# EAGLE board dac_ (EAGLE 9.0.1)
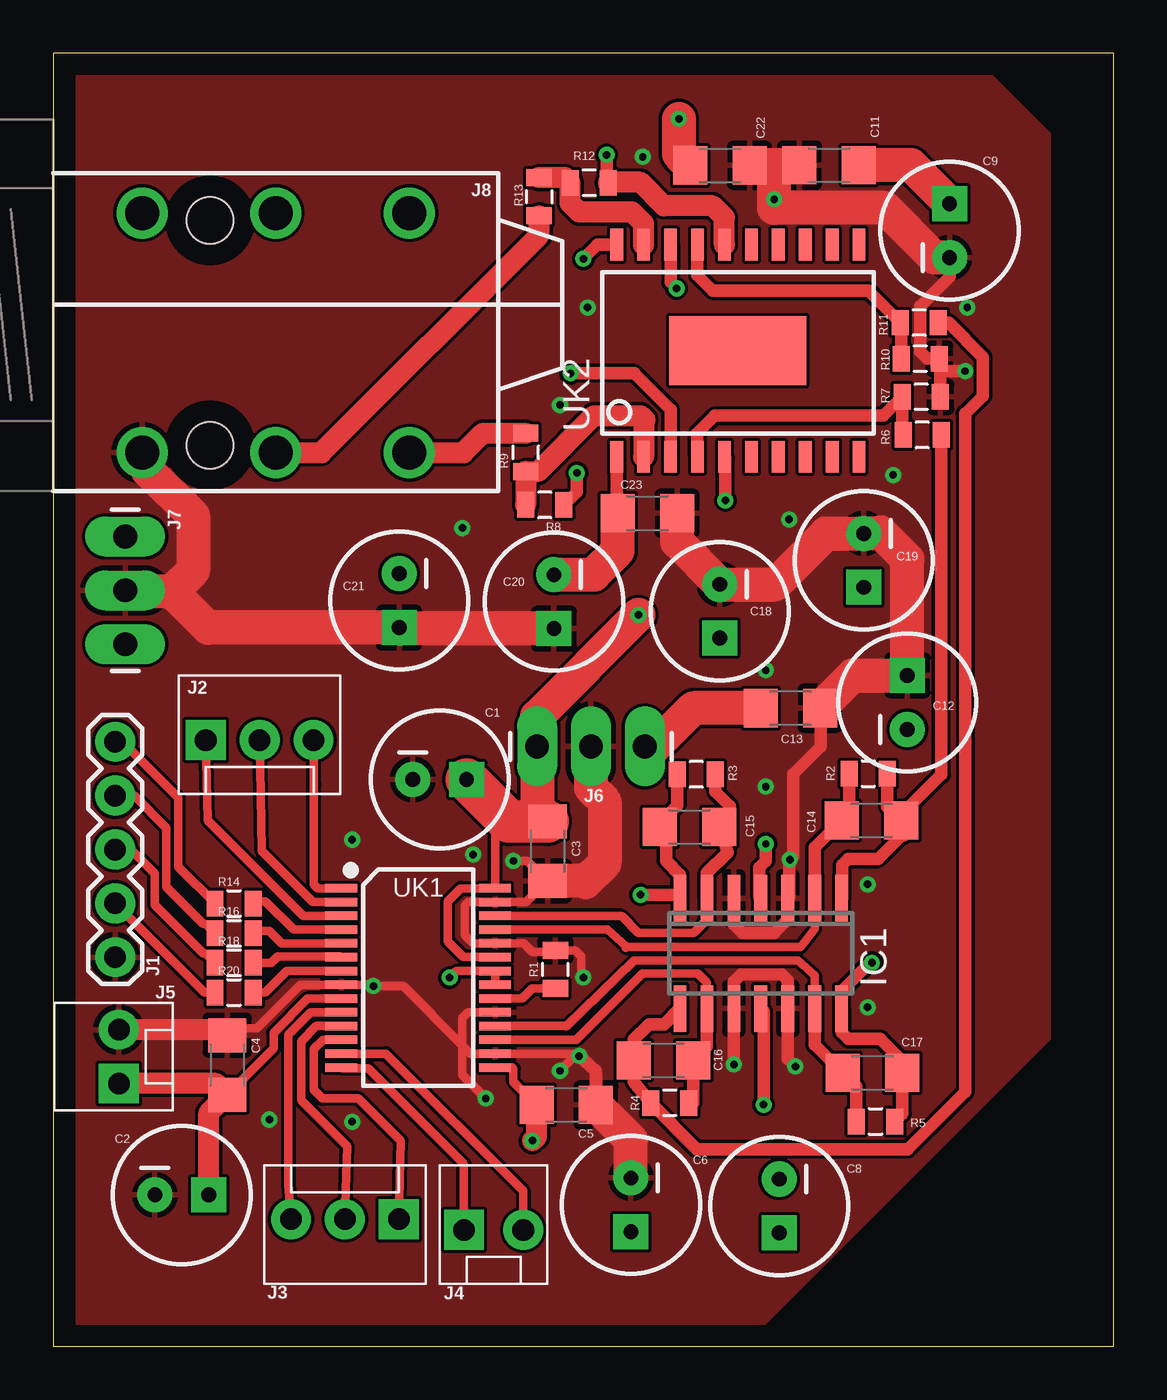
[diagram p0: board, top side]
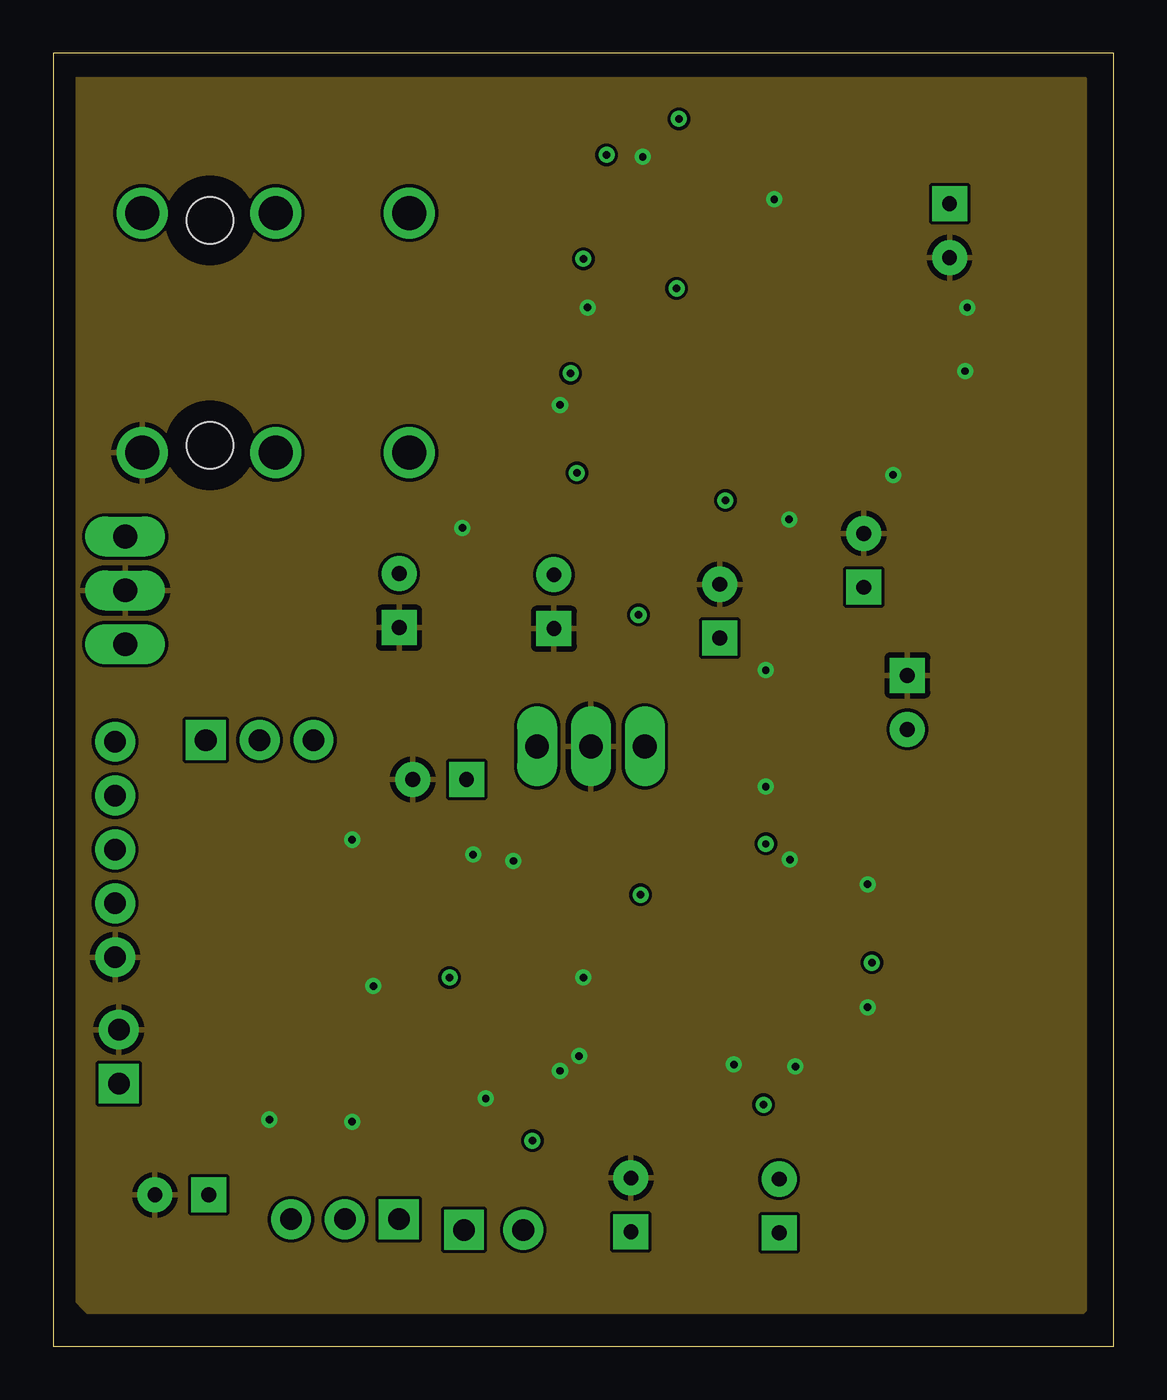
[diagram p1: board, inner layer DGND]
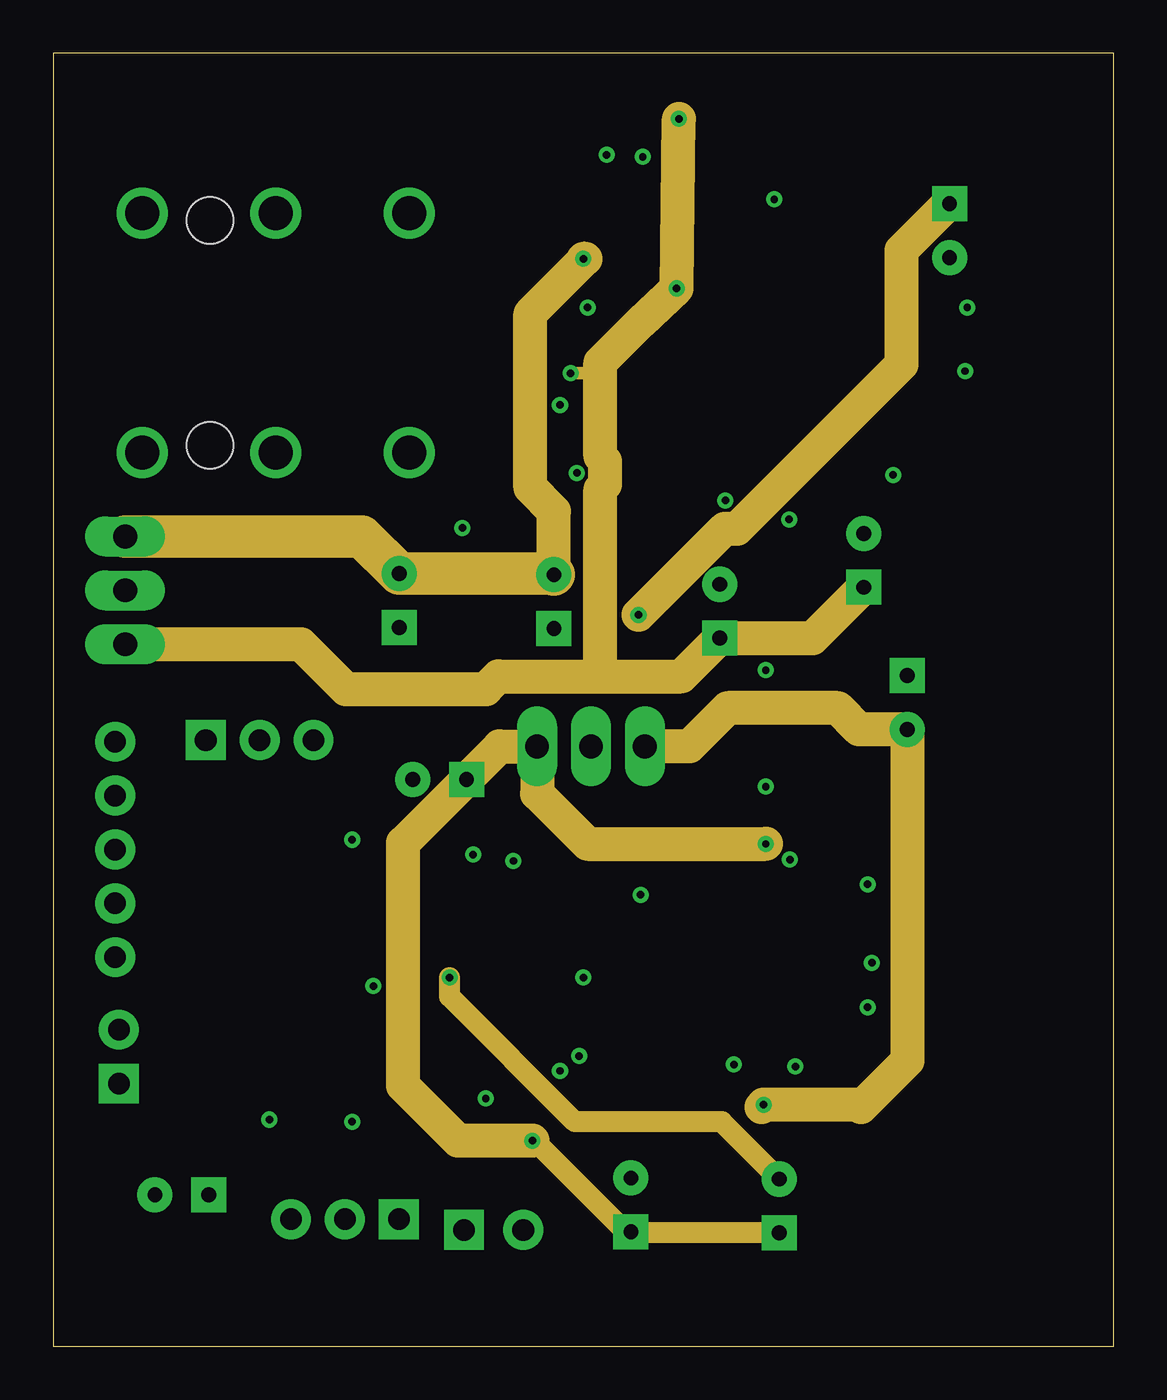
[diagram p2: board, inner layer Route15]
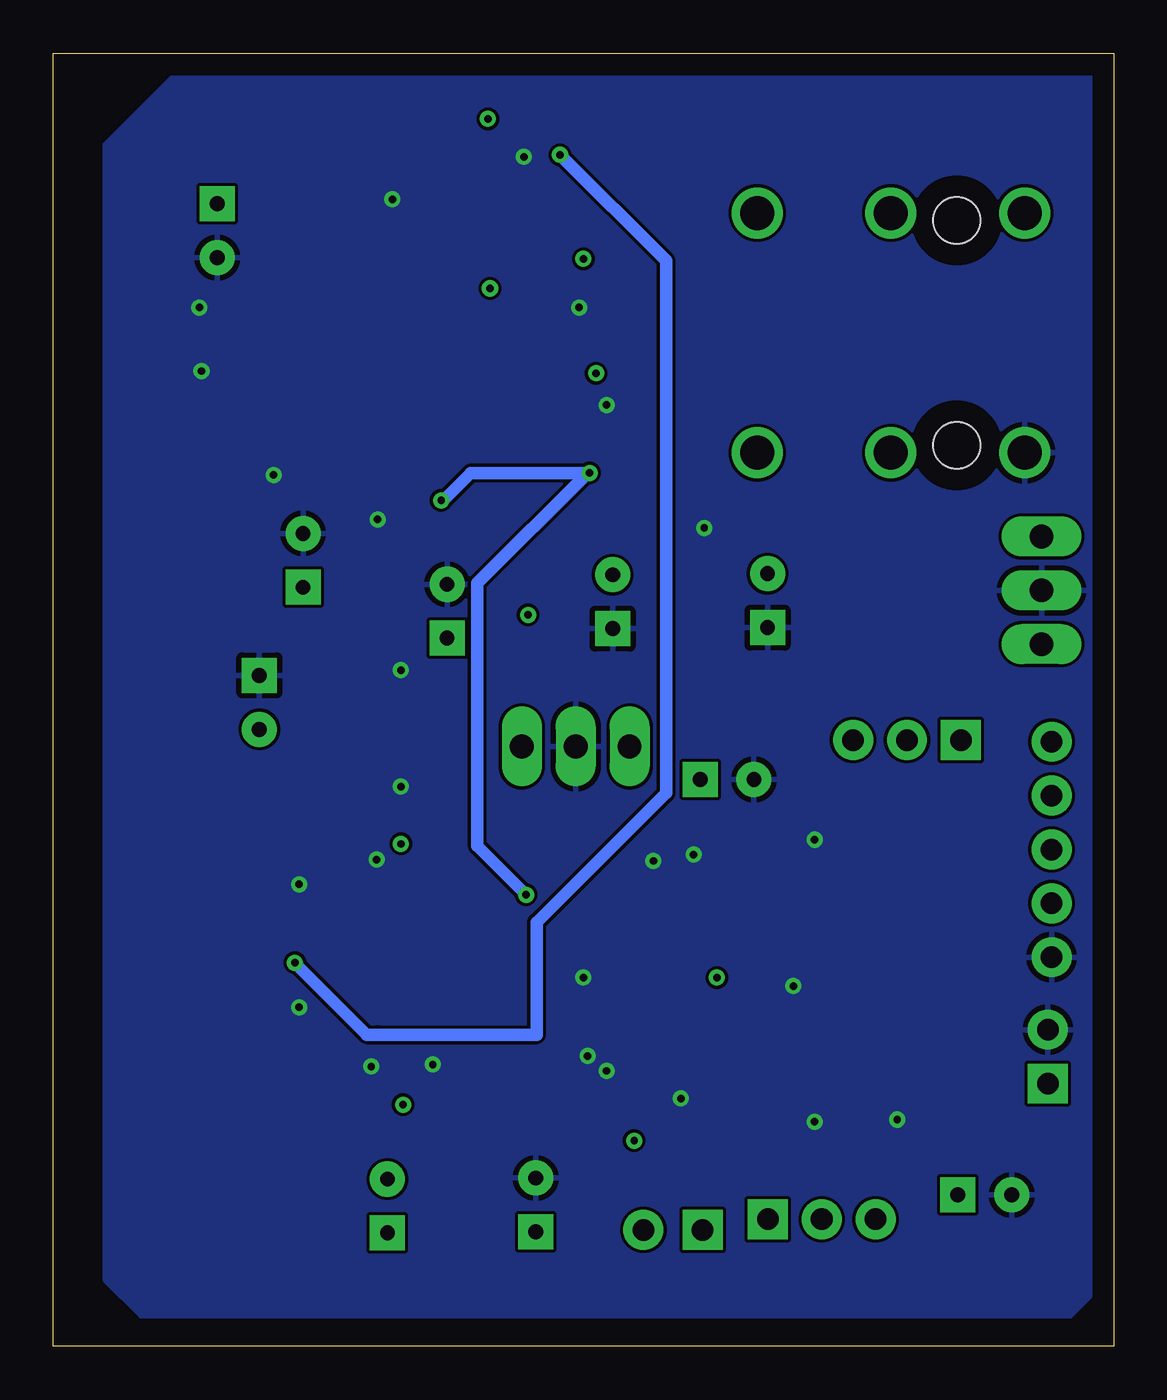
[diagram p3: board, bottom side, seen from below]

Size 50 x 61 mm. Coordinates in mm from the lower left corner, seen from the top.
Outline: 0,0 50,0 50,61 0,61 0,0
Copper layers (1*2+15*16): Top 0.035mm / dielectric 0.2mm / DGND 0.035mm / dielectric 0.3mm / Route15 0.035mm / dielectric 0.2mm / Bottom 0.035mm
Design rules "default *": minimum track width 6mil, minimum drill 0.35mm, track to track 6mil, track to pad 6mil, pad to pad 6mil, via to via 6mil, smd to smd 6mil, copper to edge 40mil, drill to drill 6mil, minimum pad ring 10mil, minimum via ring 8mil, stop-mask expansion 4mil, vias tented up to drill 0mil, thermal gap 10mil

## Footprints (pad centres in the part's own frame; a part is rotated, then mirrored left to right if it is on the bottom)
CPOL-RADIAL-100UF-25V = drill 0.7 pad 1.651 square: 1 1.27,0 | drill 0.7 pad 1.651: 2 -1.27,0
1206 = smd 1.6 x 1.8: 1 -1.4,0; 2 1.4,0
SO14 = smd 0.6 x 2.2: 1 -3.81,-2.6; 2 -2.54,-2.6; 3 -1.27,-2.6; 4 0,-2.6; 5 1.27,-2.6; 6 2.54,-2.6; 7 3.81,-2.6; 8 3.81,2.6; 9 2.54,2.6; 10 1.27,2.6; 11 0,2.6; 12 -1.27,2.6; 13 -2.54,2.6; 14 -3.81,2.6
1X05 = drill 1.016 pad 1.88: 1 0,0; 2 2.54,0; 3 5.08,0; 4 7.62,0; 5 10.16,0
MOLEX-1X3 = drill 1.016 pad 1.88 square: 1 0,0 | drill 1.016 pad 1.88: 2 2.54,0; 3 5.08,0
MOLEX-1X2_LOCK = drill 1.016 pad 1.88 square: 1 -0.127,0 | drill 1.016 pad 1.88: 2 2.667,0
MOLEX-1X2 = drill 1.016 pad 1.88 square: 1 0,0 | drill 1.016 pad 1.88: 2 2.54,0
1X03_LONGPADS = drill 1.118 pad 1.88 long: 1 0,0; 2 2.54,0; 3 5.08,0
AUDIO_JACK_0.25"_TRS_PTH_RA = drill 1.6: RING 10.5,-6.95; RING-NORM 10.5,4.35; SLEEVE 4.2,-6.95; SLEEVE-NORM 4.2,4.35; TIP 16.8,-6.95; TIP-NORM 16.8,4.35 | hole 2.2: 7.4,4; 7.4,-6.6
0805 = smd 0.8 x 1.2: 1 -0.9,0; 2 0.9,0
SSOP28-0.65-10.2X5.2MM = smd 0.4 x 1.5: 1 -4.225,-3.625; 2 -3.575,-3.625; 3 -2.925,-3.625; 4 -2.275,-3.625; 5 -1.625,-3.625; 6 -0.975,-3.625; 7 -0.325,-3.625; 8 0.325,-3.625; 9 0.975,-3.625; 10 1.625,-3.625; 11 2.275,-3.625; 12 2.925,-3.625; 13 3.575,-3.625; 14 4.225,-3.625; 15 4.225,3.625; 16 3.575,3.625; 17 2.925,3.625; 18 2.275,3.625; 19 1.625,3.625; 20 0.975,3.625; 21 0.325,3.625; 22 -0.325,3.625; 23 -0.975,3.625; 24 -1.625,3.625; 25 -2.275,3.625; 26 -2.925,3.625; 27 -3.575,3.625; 28 -4.225,3.625
SOIC20S = smd 0.6 x 1.5: 1 -5.715,-5; 2 -4.445,-5; 3 -3.175,-5; 4 -1.905,-5; 5 -0.635,-5; 6 0.635,-5; 7 1.905,-5; 8 3.175,-5; 9 4.445,-5; 10 5.715,-5; 11 5.715,5; 12 4.445,5; 13 3.175,5; 14 1.905,5; 15 0.635,5; 16 -0.635,5; 17 -1.905,5; 18 -3.175,5; 19 -4.445,5; 20 -5.715,5 | smd 6.452 x 3.251: P$1 0,0

## Placement (x,y rotation side)
C1  10uF  [CPOL-RADIAL-100UF-25V]  18.23,26.75 0 top
C2  10uF  [CPOL-RADIAL-100UF-25V]  6.08,7.14 0 top
C3  0.1uF  [1206]  23.31,23.35 270 top
C4  0.1uF  [1206]  8.21,13.27 270 top
C5  0.1uF  [1206]  24.19,11.39 180 top
C6  10uF  [CPOL-RADIAL-100UF-25V]  27.25,6.67 270 top
C8  47uF  [CPOL-RADIAL-100UF-25V]  34.23,6.62 270 top
C9  10uF  [CPOL-RADIAL-100UF-25V]  42.27,52.62 90 top
C11  0.1uF  [1206]  36.59,55.71 0 top
C12  10uF  [CPOL-RADIAL-100UF-25V]  40.27,30.38 90 top
C13  0.1uF  [1206]  34.76,30.1 180 top
C14  2.7nF  [1206]  38.58,24.8 180 top
C15  2.7nF  [1206]  30,24.5 0 top
C16  2.7nF  [1206]  28.78,13.5 0 top
C17  2.7nF  [1206]  38.64,12.9 180 top
C18  100uF  [CPOL-RADIAL-100UF-25V]  31.43,34.67 270 top
C19  10uF  [CPOL-RADIAL-100UF-25V]  38.22,37.08 270 top
C20  10uF  [CPOL-RADIAL-100UF-25V]  23.61,35.12 270 top
C21  100uF  [CPOL-RADIAL-100UF-25V]  16.32,35.17 270 top
C22  0.1uF  [1206]  31.44,55.7 0 top
C23  0.1uF  [1206]  28.02,39.3 0 top
IC1  OPA4134UA  [SO14]  33.37,18.54 180 top
J1  I2S  [1X05]  2.93,18.36 90 top
J2  [MOLEX-1X3]  7.2,28.6 0 top
J3  [MOLEX-1X3]  16.3,6 180 top
J4  [MOLEX-1X2_LOCK]  19.5,5.5 0 top
J5  +3.3V  [MOLEX-1X2]  3.1,12.4 90 top
J6  5V/GND/-5V  [1X03_LONGPADS]  27.9,28.3 180 top
J7  12V/GND/-12V  [1X03_LONGPADS]  3.4,38.2 270 top
J8  AUDIO_JACK_TRS_0.25"_PTH_RA  [AUDIO_JACK_0.25"_TRS_PTH_RA]  0,49.1 0 top
R1  10K  [0805]  23.68,17.78 90 top
R2  1K  [0805]  38.43,27.02 0 top
R3  1K  [0805]  30.32,26.98 180 top
R4  1K  [0805]  29.07,11.48 180 top
R5  1K  [0805]  38.78,10.62 0 top
R6  1K  [0805]  40.98,42.98 180 top
R7  1K  [0805]  40.93,44.78 180 top
R8  1K  [0805]  23.18,39.69 180 top
R9  39.2  [0805]  22.29,42.17 90 top
R10  1K  [0805]  40.88,46.59 180 top
R11  1K  [0805]  40.84,48.28 180 top
R12  1K  [0805]  25.28,54.88 180 top
R13  39.2  [0805]  22.92,54.23 270 top
R14  [0805]  8.54,20.89 0 top
R16  [0805]  8.54,19.49 0 top
R18  [0805]  8.54,18.09 0 top
R20  [0805]  8.54,16.7 0 top
UK1  PCM1794A  [SSOP28-0.65-10.2X5.2MM]  17.21,17.39 270 top
UK2  TPA6120A2  [SOIC20S]  32.29,46.96 0 top

## Library data of the parts
C1-C6 C8 C9 C11-C23 R1-R14 R16 R18 R20 = SparkFun-Passives
IC1 = linear; SPICEPREFIX: J
J1 J6 J7 = SparkFun-Connectors
J2 J3 = SparkFun-Connectors; PROD_ID: CONN-08625; SF_ID: PRT-08096
J4 J5 = SparkFun-Connectors; SF_ID: PRT-09918
J8 = SparkFun-Connectors; PROD_ID: CONN-12339; SF_ID: COM-11144
UK1 UK2 = EduAreaLib

## Nets
3.3V: C2.1 C4.2 J5.1 UK1.9
5V: C1.1 C3.1 C5.2 C6.1 C8.1 C9.1 C11.2 IC1.4 J6.3 UK1.15 UK1.23 UK1.28
!RST!: J4.1 UK1.14
+12V: C18.1 C19.1 C22.1 J7.3 UK2.3 UK2.18
-5V: C12.2 C13.2 IC1.11 J6.1
-12V: C20.2 C21.2 C23.1 J7.1 UK2.1 UK2.20
BCK: R18.2 UK1.6
CHSL: J2.2 UK1.2
DATA: R16.2 UK1.5
DEM: J2.1 UK1.3
DGND: C1.2 C2.2 C3.2 C4.1 C5.1 C6.2 C9.2 C11.1 C12.1 C13.1 C18.2 C19.2 C20.1 C21.1 C22.2 C23.2 IC1.3 IC1.5 IC1.10 IC1.12 J1.1 J5.2 J6.2 J7.2 J8.SLEEVE R1.2 R7.1 R10.1 UK1.8 UK1.16 UK1.19 UK1.24 UK1.27
FMT0: J3.2 UK1.11
FMT1: J3.1 UK1.12
LOUT: J8.TIP R9.2
LRCK: R14.2 UK1.4
MONO: J2.3 UK1.1
MUTE: J3.3 UK1.10
N$1: C15.2 IC1.6 R3.1 UK1.26
N$2: C14.2 IC1.2 R2.1 UK1.25
N$3: R1.1 UK1.20
N$4: R6.2 R7.2 UK2.4
N$5: C14.1 IC1.1 R2.2 R6.1
N$6: C8.2 UK1.21 UK1.22
N$7: J1.5 R14.1
N$8: C15.1 IC1.7 R3.2 R8.1 UK2.5
N$9: R8.2 R9.1 UK2.2
N$10: R10.2 R11.2 UK2.17
N$11: R12.2 R13.1 UK2.19
N$12: C16.1 IC1.8 R4.2 R11.1
N$13: J1.4 R16.1
N$14: C16.2 IC1.9 R4.1 UK1.17
N$16: J1.3 R18.1
N$17: C17.2 IC1.13 R5.1 UK1.18
N$19: J1.2 R20.1
N$25: C17.1 IC1.14 R5.2 R12.1 UK2.16
ROUT: J8.RING R13.2
SYSCK: R20.2 UK1.7
ZERO: J4.2 UK1.13

## Tracks (layer width: path | path; a pad name or v marks a point on that pad's centre or on a via)
3.3V
  Top 0.4: UK1.9 12.01,16.41 10.4,14.8 10.4,14.06 C4.2
  Top 1: C2.1 7.34,11.01 C4.2 7.69,12.4 J5.1
5V  (via drill 0.35)
  Top 0.4: 21.49,24.75 20.84,24.11 UK1.28 19.21,21.61 18.6,21 18.6,19.1 19.34,18.36 UK1.23 | C5.2 21.7,12.48 21.7,13.1 21.64,13.16 UK1.15
  Top 0.6: v33.6,23.7 33.6,22.9 33.3,22.6 33.3,21.21 IC1.4
  Top 1: C5.2 22.79,9.89 v22.6,9.7
  Top 1.6: C9.1 40.45,55.71 C11.2 | C3.1 22.82,25.25 J6.3 22.82,29.72 v27.6,34.5
  Top 2: C3.1 21.49,24.75 C1.1
  Route15 1: C8.1 27.3,5.36 C6.1 27,5.41 22.8,9.6 22.7,9.6 v22.6,9.7
  Route15 1.6: v33.6,23.7 25.2,23.7 22.82,26.08 J6.3 21.05,28.3 C1.1 16.5,23.75 16.5,12.3 19.1,9.7 v22.6,9.7 | v27.6,34.5 31.67,38.57 32.25,38.57 40,46.32 40,51.7 42.2,53.9 C9.1
!RST!
  Top 0.4: J4.1 19.37,8.62 14.87,13.12 13.63,13.12 UK1.14
+12V  (via drill 0.35)
  Top 0.6: UK2.3 29.11,44.19 27.4,45.9 v24.4,45.9 | UK2.18 29.11,50.19 v29.4,49.9
  Top 1.6: v29.5,57.9 29.5,56.24 C22.1
  Route15 0.6: v24.4,45.9 25.3,45.9 25.8,46.4
  Route15 1.6: J7.3 11.68,33.12 13.8,31 20.4,31 21,31.6 25.8,31.6 | 25.8,31.6 29.62,31.6 C18.1 35.81,33.41 C19.1 | 25.8,31.6 25.8,40.42 26.03,40.65 26.03,41.75 25.8,41.98 25.8,46.4 27.7,48.3 v29.4,49.9 v29.5,57.9
-5V  (via drill 0.35)
  Top 0.6: v33.5,11.4 33.5,15.81 IC1.11
  Top 1.6: C13.2 30.19,30.1 28.07,27.98 28.07,27.97 27.9,27.8 J6.1
  Route15 1.6: J6.1 30,28.3 31.8,30.1 37,30.1 37.99,29.11 C12.2 40.27,13.47 38.1,11.3 38,11.4 v33.5,11.4 33.4,11.3
-12V  (via drill 0.35)
  Top 0.6: UK2.1 26.57,39.35 C23.1 | v25,51.3 25.66,51.96 UK2.20
  Top 1.6: C20.2 25.5,36.4 26.62,37.52 C23.1
  Route15 1.6: v25,51.3 25.1,51.3 22.5,48.7 22.5,40.5 23.61,39.38 C20.2
  Route15 2: C20.2 23.57,36.45 C21.2 14.56,38.2 J7.1
BCK
  Top 0.4: R18.2 10.29,18.09 10.6,18.4 13.55,18.4 UK1.6
CHSL
  Top 0.4: UK1.2 12.24,20.96 9.84,23.36 J2.2
DATA
  Top 0.4: UK1.5 10.79,19.01 10.2,19.6 9.54,19.6 R16.2
DEM
  Top 0.4: UK1.3 11.79,20.31 7.3,24.8 J2.1
DGND  (via drill 0.35)
  Top 0.4: 8.54,15 9.6,15 11.66,17.06 UK1.8 14.94,17.06 15,17 | 24.69,13.81 UK1.16 19.71,13.81 19.7,13.8 19.3,14.2 | 24.69,13.81 25.7,12.8 25.7,11 | 25.7,11 25.8,10.9 | 25.7,11 25.59,11.11 C5.1 | UK1.19 19.56,15.76 19.3,15.5 19.3,14.2 | v25,17.4 24.9,17.5 24.9,18.4 24.62,18.68 R1.2 23.6,18.6 22.6,18.6 22.19,19.01 UK1.24 19.81,19.01 19.8,19 19.4,19.4 19.4,20.8 19.56,20.96 UK1.27 22.32,20.96 C3.2 22.37,22.9 v21.7,22.9 | v23.9,13 24.69,13.79 24.69,13.81 | v20.4,11.7 19.3,12.8 19.3,14.2 | v15.1,17 16.5,17 19.3,14.2
  Top 0.6: C5.1 25.59,12.99 v24.8,13.7 | v32.1,13.3 IC1.10 32.1,17.2 32.45,17.55 34.35,17.55 34.64,17.26 IC1.12 34.64,13.56 v35,13.2 | IC1.5 32.1,19.9 32.5,19.5 34,19.5 34.64,20.14 IC1.3 34.7,21.2 34.7,22.92 v34.74,22.96 34.9,23.12 34.9,27 36.2,28.3 36.2,30.06 C13.1 | R7.1 41.83,46 | 41.83,46 41.83,46.54 R10.1 41.22,46.59 40.88,46.92 40.88,49.07 42.27,50.45 C9.2 | 41.83,46 v43,46
  Top 1: C4.1 7.95,14.94 J5.2
  Top 1.6: C6.2 27.25,9.74 C5.1 | C23.2 29.42,37.95 C18.2 34.05,35.95 36.45,38.34 C19.2 38.95,38.34 39,38.4 40.27,37.12 C12.1 37.7,31.64 C13.1 | C11.1 35.17,55.7 34,55.7 | 34,55.7 C22.2 | C9.2 41.55,51.35 39.2,53.7 34,53.7 34,55.7 | J8.SLEEVE 4.48,41.87 4.48,41.29 6.6,39.18 6.6,36.6 5.6,35.6 | J7.2 3.46,35.6 5.6,35.6 | 5.6,35.6 7.29,33.91 C21.1 16.36,33.85 C20.1 | J6.2 25.36,26.34 26,25.7 26,22.8 25.1,21.9 25.05,21.95 C3.2
  other vias: 14.1,23.9 19.8,23.2 14.1,10.6 10.2,10.7 38.4,16 38.4,21.8 33.6,26.4 33.6,31.9 34.7,39 39.6,41.1 43.1,49 34,54.1 27.8,56.1 25.2,49 23.9,44.4 19.3,38.6
  pour DGND: 1.6,1.6 48.6,1.6 48.7,1.7 48.7,59.8 1.1,59.8 0.9,60 0.9,2.3
  pour Top: 0.7,0.8 0.8,0.7 33.2,0.7 47,14.5 47,57.2 43.7,60.5 0.8,60.5
  pour Bottom: 0.8,60.2 44.1,60.2 47.6,56.7 47.6,3.1 45.9,1.4 2,1.4 0.5,2.9 0.5,59.9
FMT0
  Top 0.4: 13.58,15.1 UK1.11 12.41,15.11 11.7,14.4 11.7,11.6 13.86,9.44 J3.2
FMT1
  Top 0.4: J3.1 16.4,9.7 14.4,11.7 12.7,11.7 12.3,12.1 12.3,14.03 12.74,14.47 UK1.12
LOUT
  Top 1: J8.TIP 19.35,42.15 20.27,43.07 R9.2
LRCK
  Top 0.4: UK1.4 11.34,19.66 10,21 9.55,21 R14.2
MONO
  Top 0.4: UK1.1 12.49,21.61 12.3,21.8 12.3,26.52 J2.3
MUTE
  Top 0.4: UK1.10 12.16,15.76 11.1,14.7 11.1,7.62 J3.3
N$1
  Top 0.4: IC1.6 30.83,20.13 30.2,19.5 27.6,19.5 26.8,20.3 UK1.26
  Top 0.6: R3.1 31.22,26.18 31.9,25.5 31.9,24.6 C15.2 31.8,23.3 30.83,22.33 IC1.6
N$2
  Top 0.4: UK1.25 26.14,19.66 27.05,18.85 | 27.05,18.85 27,18.8 | 27.05,18.85 29.9,18.85 35.25,18.85 35.9,19.7 35.91,19.79 IC1.2
  Top 0.6: R2.1 37.53,25.15 C14.2 35.91,23.53 IC1.2
N$3
  Top 0.4: UK1.20 22.11,16.41 22.58,16.88 R1.1
N$4
  Top 0.6: R6.2 40.03,43.03 R7.2 39.14,43.9 31.2,43.9 30.38,43.08 UK2.4
N$5
  Top 0.6: C14.1 39.5,24.6 41.88,26.98 R6.1 | R2.2 39.33,25.45 C14.1 | IC1.1 37.2,21.16 37.2,22.7 37.5,23 38.9,23 40,24.1 40.1,24.1 40.1,24.68 C14.1
N$6  (via drill 0.35)
  Top 0.4: v18.7,17.4 19.01,17.71 UK1.22 UK1.21
  Route15 1: C8.2 31.53,10.6 24.6,10.6 18.7,16.5 v18.7,17.4
N$7
  Top 0.4: R14.1 5.9,22.62 5.9,25.9 3.28,28.52 J1.5
N$8  (via drill 0.35)
  Top 0.6: IC1.7 29.56,22.24 28.9,22.9 28.9,24.4 | 28.9,24.4 C15.1 | R3.2 29.42,25.52 28.9,25 28.9,24.4 | IC1.7 29.56,22.26 | IC1.7 29.4,21.3 v27.7,21.3 | v24.7,41.2 24.7,40.3 R8.1 | v31.7,39.9 31.7,41.91 UK2.5
  Bottom 0.6: v27.7,21.3 30,23.6 30,36 24.8,41.2 v24.7,41.2 30.3,41.2 31.6,39.9 v31.7,39.9
N$9
  Top 1: R8.2 R9.1 22.87,41.27 25.5,43.9 27.7,43.9 27.9,43.7 27.84,43.64 UK2.2
N$10
  Top 0.6: R10.2 39.98,48.24 R11.2 38.42,49.8 31.1,49.8 30.38,50.52 UK2.17
N$11
  Top 1: R13.1 24.13,55.13 R12.2 24.38,53.92 24.8,53.5 27.3,53.5 27.84,52.96 UK2.19
N$12
  Top 0.6: IC1.8 28.82,15.2 28.1,15.2 27.38,14.48 C16.1 27.38,12.48 R4.2 30.36,9.3 40.3,9.3 43,12 43,44 43.83,44.83 43.83,46.67 42.22,48.28 R11.1
N$13
  Top 0.4: 7.6,19.46 R16.1 7.19,19.94 7.09,19.94 5.35,21.68 5.35,24.45 3.82,25.98 J1.4
N$14
  Top 0.4: IC1.9 30.83,17.17 30.4,17.6 27.8,17.6 24.66,14.46 UK1.17
  Top 0.6: IC1.9 30.83,14.15 C16.2 30.18,11.49 R4.1
N$16
  Top 0.4: 7.43,18.3 R18.1 7.19,18.54 7.09,18.54 4.79,20.83 4.79,22.3 3.66,23.44 J1.3
N$17
  Top 0.4: 36,15.85 IC1.13 35.91,17.49 35.1,18.2 27.4,18.2 24.2,15.1 24.19,15.11 UK1.18
  Top 0.6: IC1.13 35.91,14.23 C17.2 37.88,12.27 R5.1
N$19
  Top 0.4: R20.1 7.12,16.7 J1.2
N$25  (via drill 0.35)
  Top 0.6: R5.2 40.04,10.98 C17.1 40.04,13.34 40.1,13.4 39,14.5 37.5,14.5 37.18,14.82 IC1.14 37.18,16.78 38.5,18.1 v38.6,18.1 | v26.1,56.2 26.1,54.99 26.2,54.9
  Top 1: UK2.16 31.65,53.25 31.1,53.8 28.8,53.8 27.7,54.9 26.2,54.9 R12.1
  Bottom 0.6: v38.6,18.1 35.2,14.7 34.7,14.7 27.2,14.7 27.2,20 21.1,26.1 21.1,51.2 v26.1,56.2
ROUT
  Top 1: J8.RING 12.65,42.15 22.92,52.42 R13.2
SYSCK
  Top 0.4: UK1.7 11.01,17.71 10,16.7 R20.2
ZERO
  Top 0.4: UK1.13 15.69,13.81 22.17,7.33 J4.2

## Text on the board
tValues: GND | Crimea/prototype/ver-2 / sl@whiteants.net